# Altium PCB heron-payload-ssm.PcbDoc (part 1 of 3)
Units mm, origin at the board's own origin, x right, y up, seen from the top; angles counter-clockwise.
Board outline 128 x 54 mm, 4 copper layers (Top Layer, GND, VCC, Bottom Layer), stack 0.778 mm thick; 199 components, 184 nets, 851 pads, 416 vias.
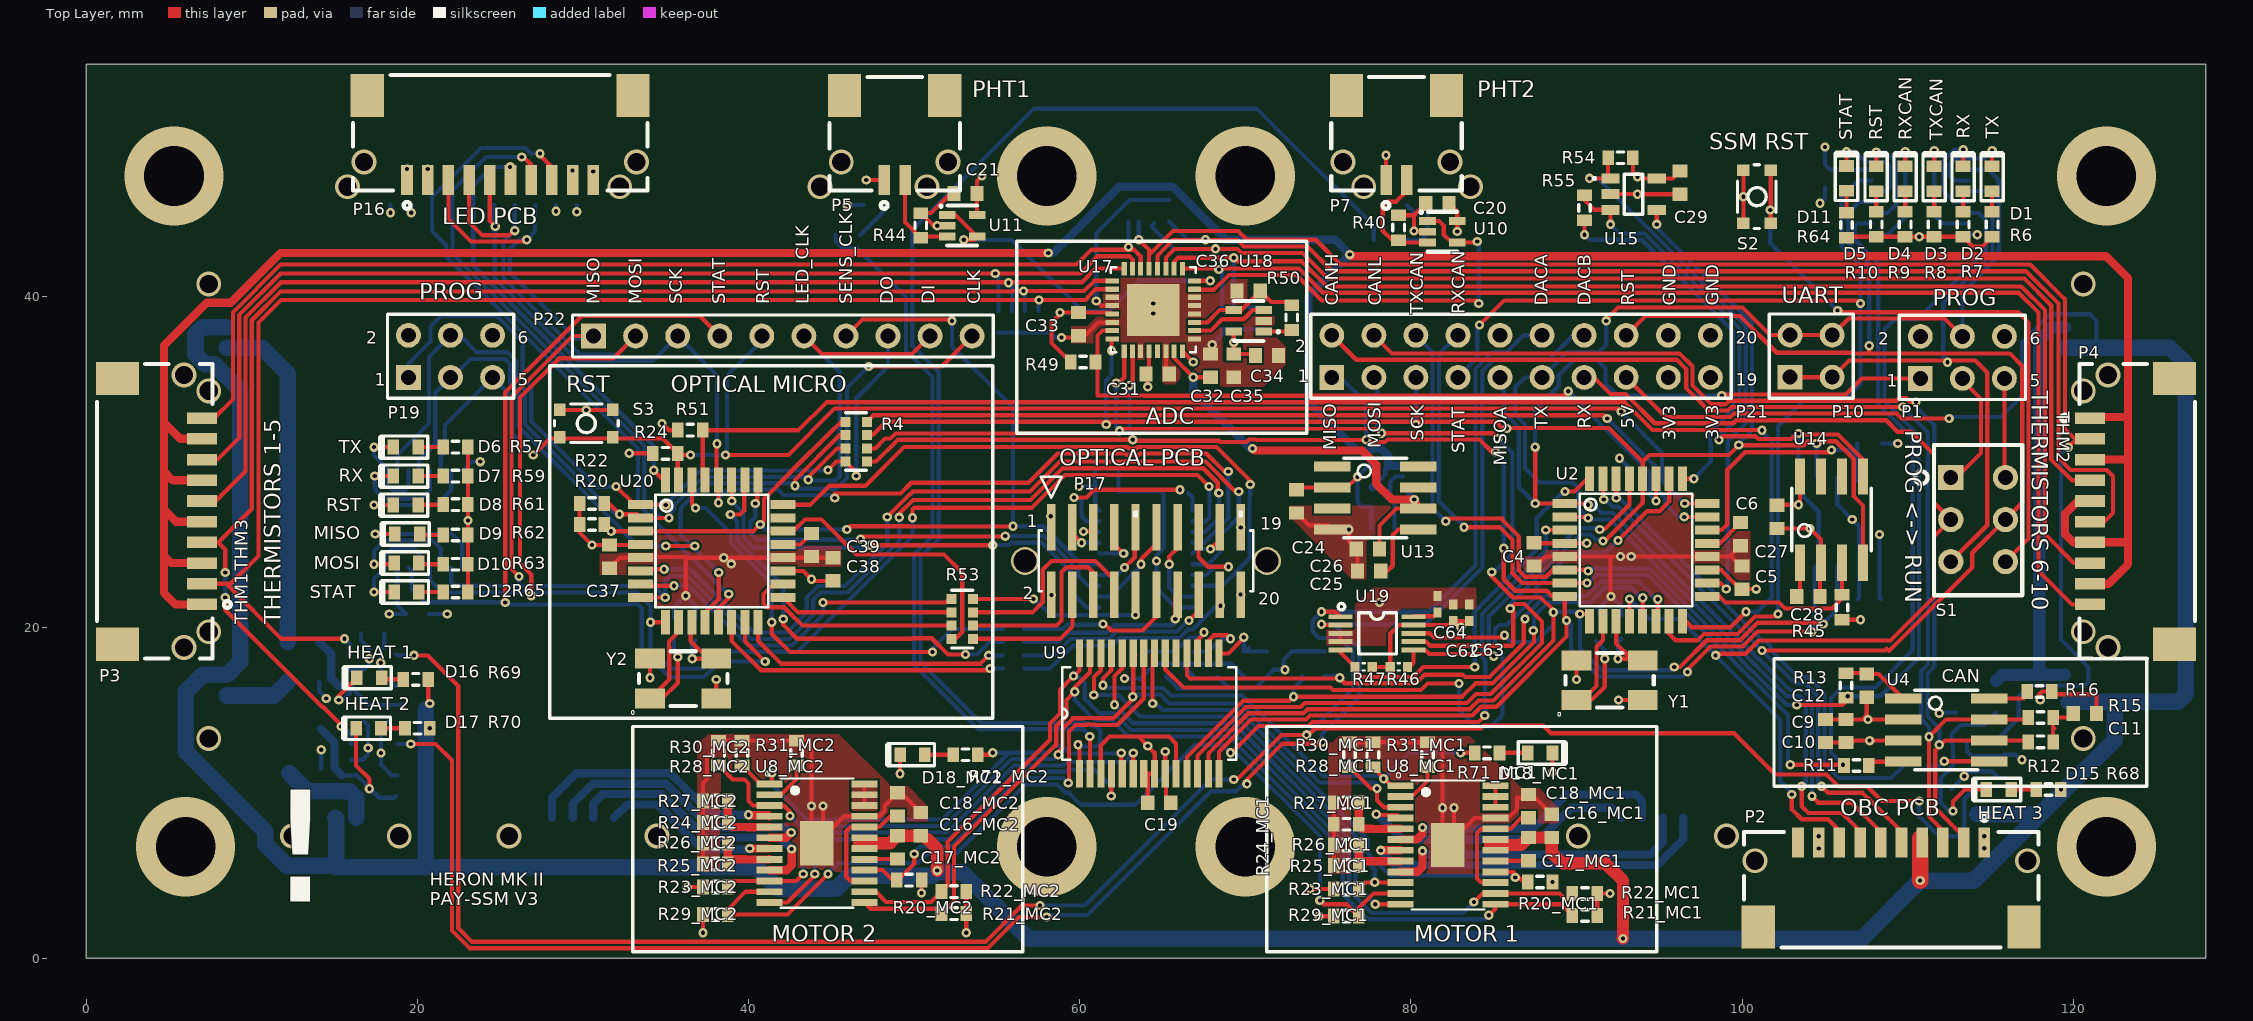
[diagram p0: Top Layer view]
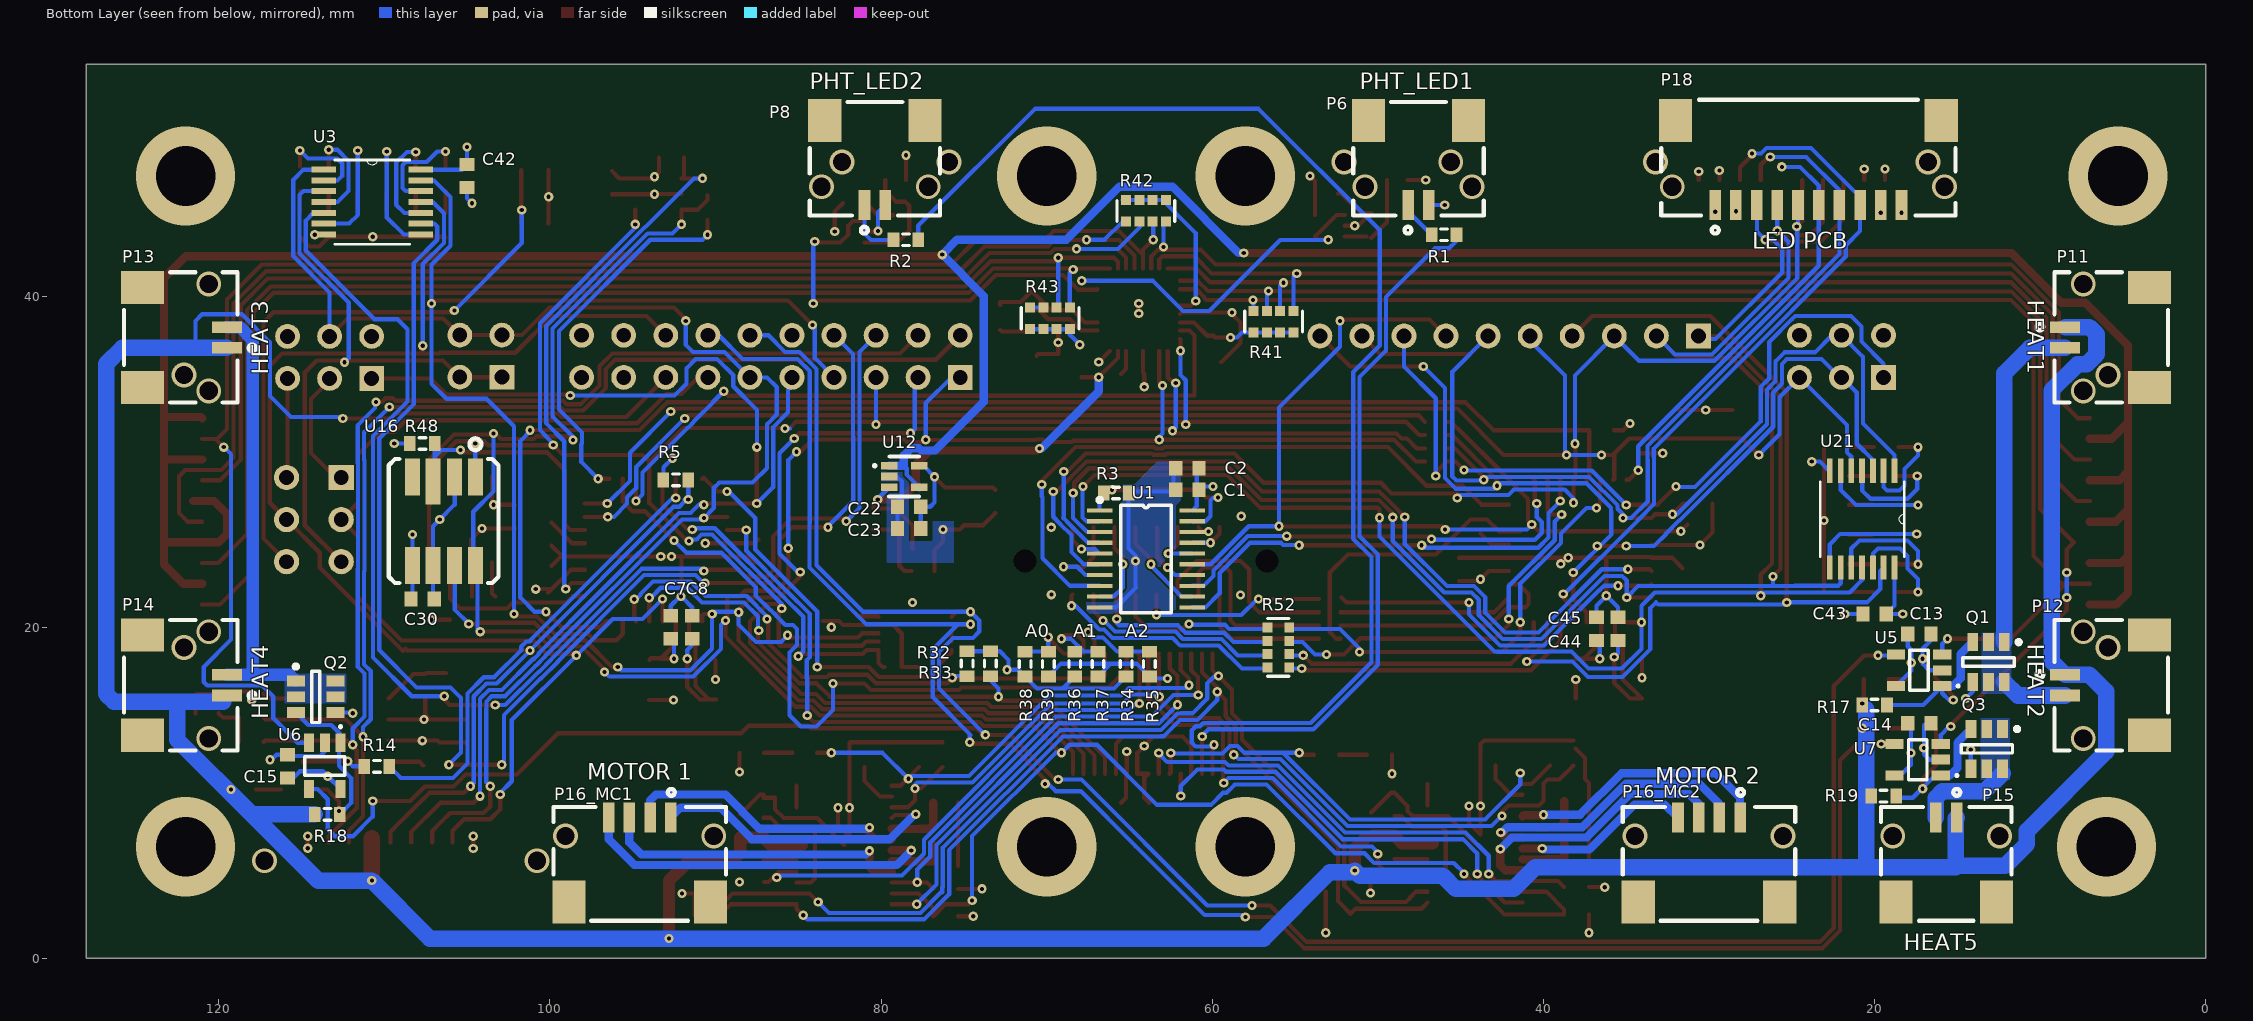
[diagram p1: Bottom Layer view, seen from below]
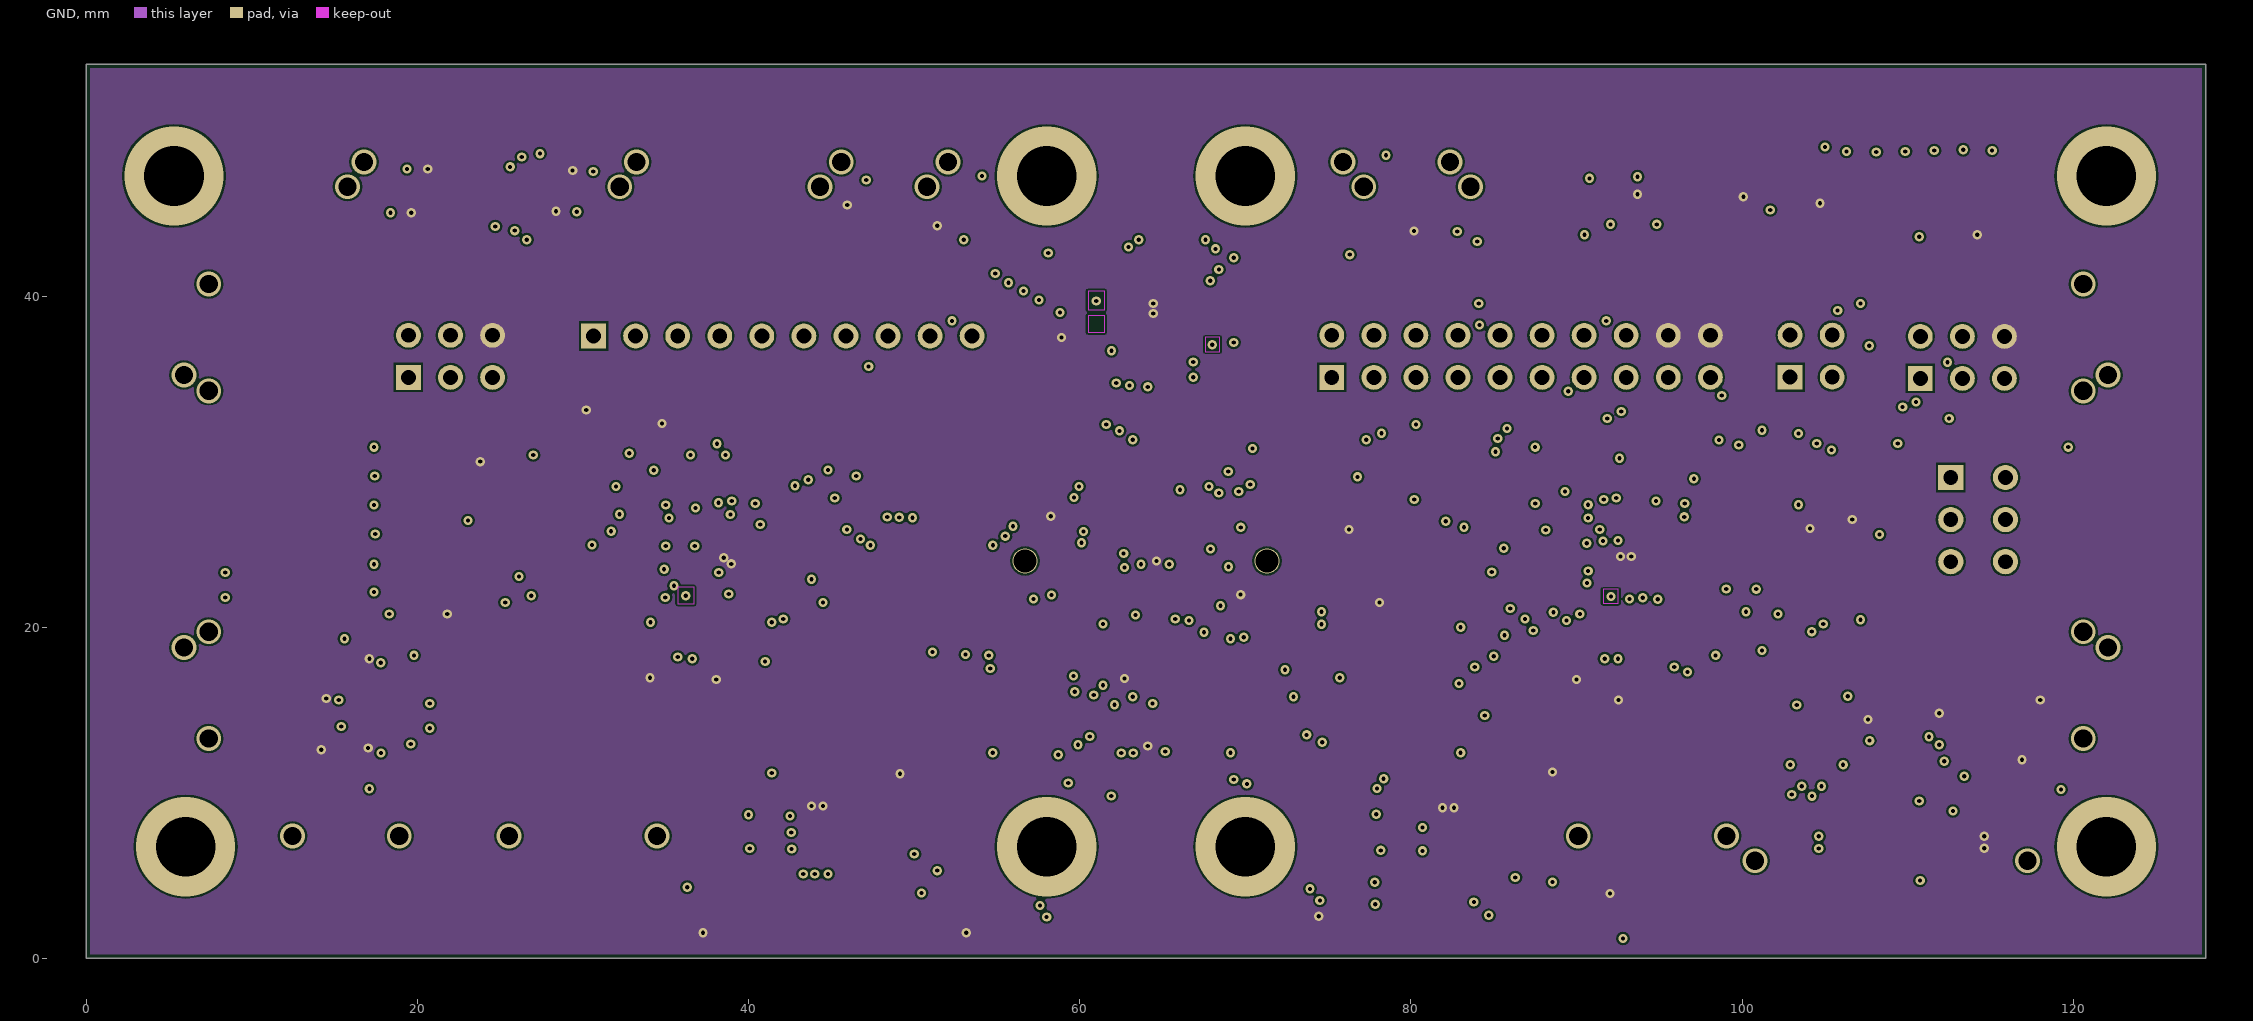
[diagram p2: GND]
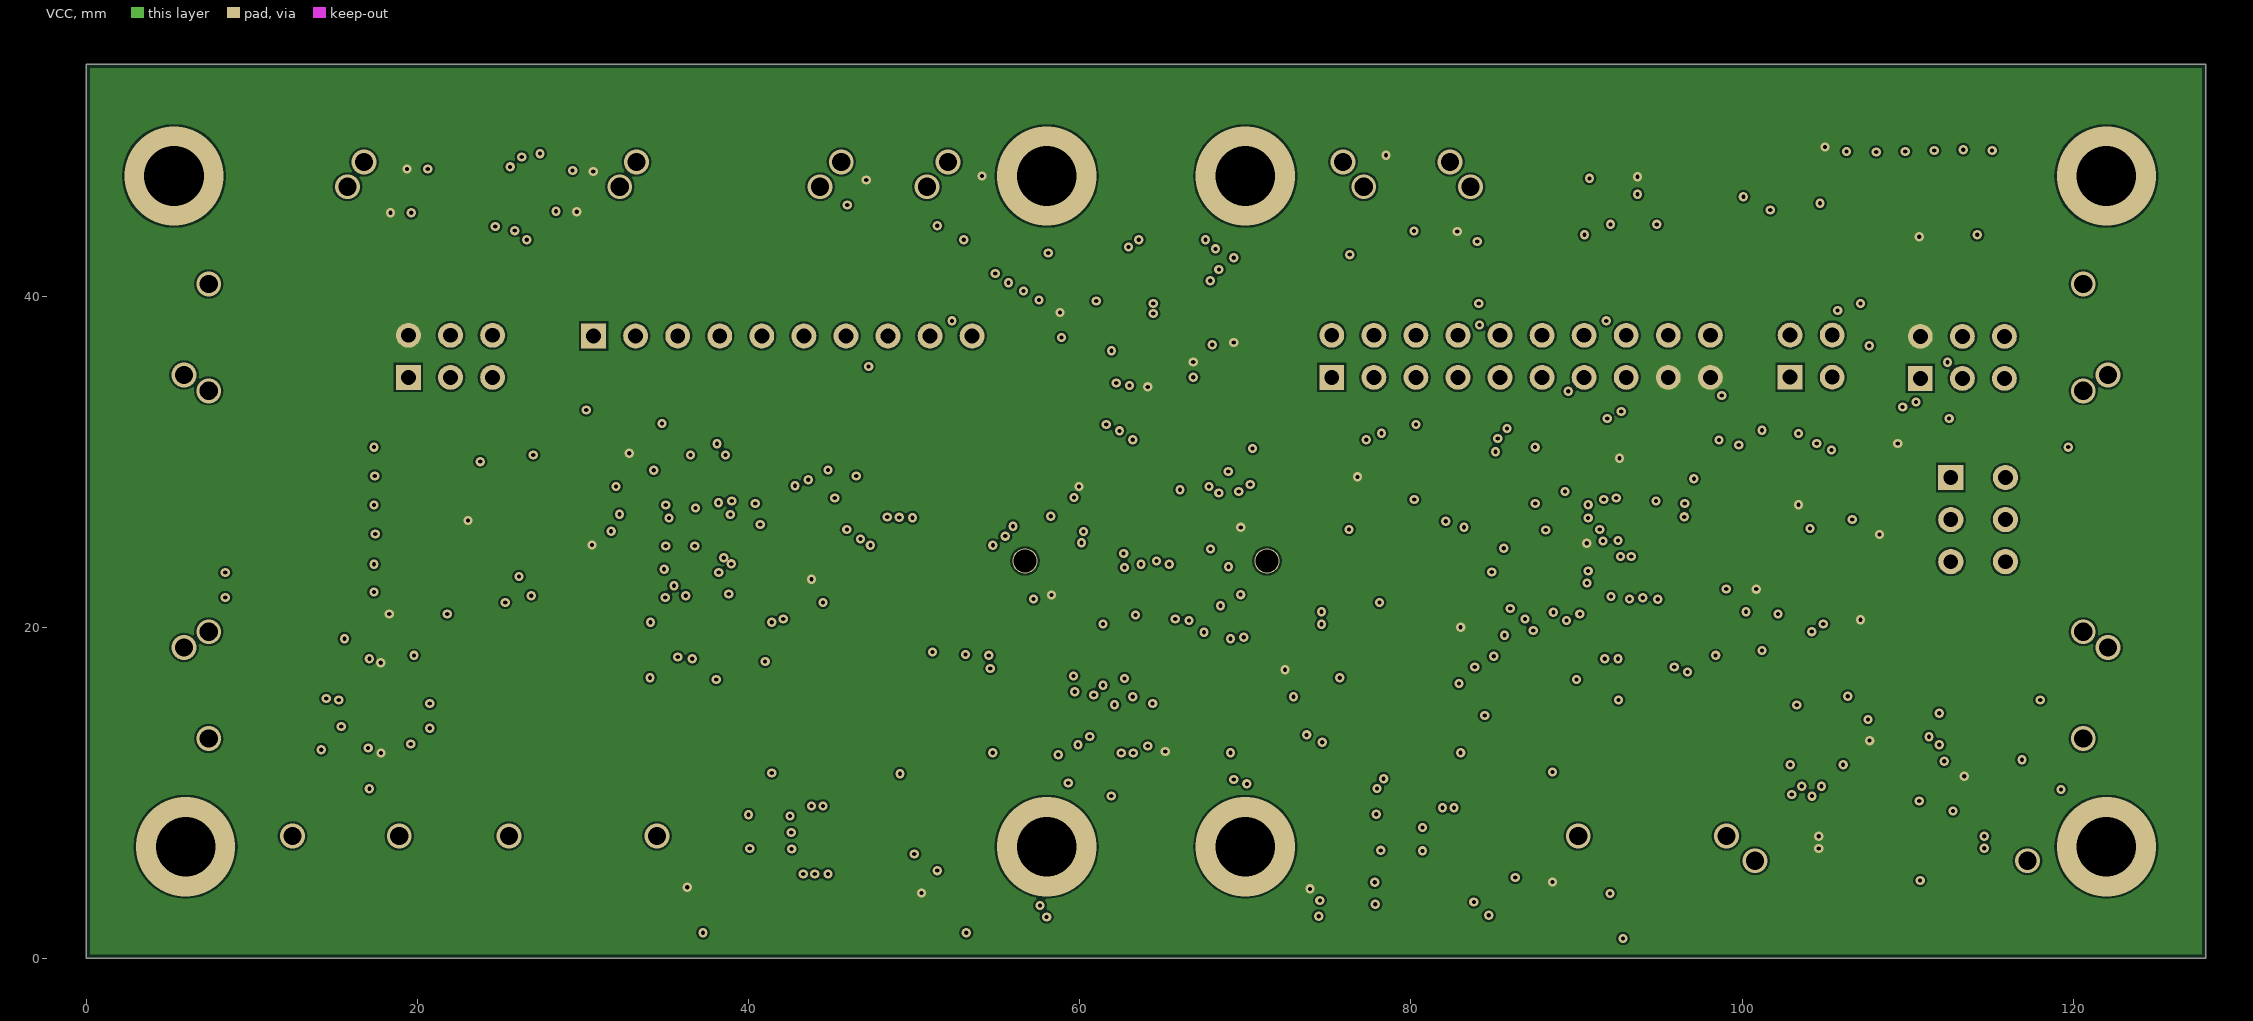
[diagram p3: VCC]

## Layer stack, top to bottom
Top Solder: solder mask 0.0102, Solder Resist, Dk 3.5
Top Layer: signal copper 0.0356
Dielectric 1: core 0.254, FR-4, Dk 4.2
GND: signal copper 0.036
Dielectric 5: prepreg 0.127, Dk 4.2
VCC: signal copper 0.036
Dielectric 4: core 0.254, Dk 4.2
Bottom Layer: signal copper 0.0356
Bottom Solder: solder mask 0.0102, Solder Resist, Dk 3.5

## Board outline
0,0 128,0 128,54 0,54

## Design rules (kind name [scope] priority, off if disabled: settings)
AssemblyTestPointUsage [All] p1 off:
AssemblyTestpoint [All] p1 off: testpointundercomponent=TRUE minsize=1.016 maxsize=2.54 preferedsize=1.524 minholesize=0 maxholesize=1.016 preferedholesize=0.813 testpointgrid=0.025 usegrid=TRUE gridtolerance=0 allowsidetop=TRUE allowsidebottom=TRUE
BoardOutlineClearance [OnLayer('VCC') or OnLayer('GND')] p1: gap=0.381 ignorepadtopadclearanceinfootprint=FALSE // Inner layer clearance
BoardOutlineClearance BoardOutlineClearance_1 [All] p2: gap=0.254 ignorepadtopadclearanceinfootprint=FALSE // top and bottom layers
Clearance [All] p1: gap=0.127 ignorepadtopadclearanceinfootprint=FALSE except(0: Arc-Hole Track-Hole SMDPad-Hole THPad-Hole Via-Hole Fill-Hole Poly-Hole Region-Hole Text-Hole)
FabricationTestPointUsage [All] p1 off: valid=0 allowmultiple=FALSE
FabricationTestpoint [All] p1 off: side=3 testpointundercomponent=FALSE minsize=1.016 maxsize=2.54 preferedsize=1.524 minholesize=0 maxholesize=1.016 preferedholesize=0.813 testpointgrid=0.025 allowsidetop=TRUE allowsidebottom=TRUE usegrid=TRUE gridtolerance=0
HoleSize [All] p1: absolutevalues=TRUE maxlimit=6.35 minlimit=0.203 maxpercent=80.000 minpercent=20.000
MinimumAnnularRing [All] p1: minimumring=0.127
MinimumSolderMaskSliver [All] p1: minsoldermaskwidth=0.102
PlaneConnect [All] p1: planeconnectstyle=Direct reliefexpansion=0.508 reliefentries=4 reliefconductorwidth=0.254 reliefairgap=0.254
PolygonConnect [All] p1: connectstyle=Direct reliefconductorwidth=0.254 reliefentries=4 polygonreliefangle="90 Angle" airgapwidth=0.254
RoomDefinition U_can_transciever [InComponentClass('U_can_transciever')] p1: confinementstyle=ConfineIn formatcopy=TRUE lockcomponents=FALSE outline 104.077,9.3 122.277,9.3 122.277,18 104.077,18
RoomDefinition U_dac-layout [InComponentClass('U_dac-layout')] p2: confinementstyle=ConfineIn formatcopy=TRUE lockcomponents=FALSE outline 74.65,16.882 84.4,16.882 84.4,22.632 74.65,22.632
RoomDefinition U_sensors-digital [InComponentClass('U_sensors-digital')] p3: confinementstyle=ConfineIn formatcopy=TRUE lockcomponents=FALSE outline 7.744,9.453 7.744,9.117 52.844,9.117 52.844,9.051 54.169,9.051 54.169,9.043 62.582,9.043 62.582,9 72.313,9 72.313,9.069 74.806,9.069 74.806,9.146 74.906,9.146 74.906,9.253 120.456,9.253 120.456,9.588 111.588,9.588 111.588,9.453
RoomDefinition U_thermistorADC [InComponentClass('U_thermistorADC')] p4: confinementstyle=ConfineIn formatcopy=TRUE lockcomponents=FALSE outline 69.914,34.327 68.206,34.327 68.206,34.376 66.752,34.376 66.752,37.13 63.909,37.13 63.909,37.673 61.155,37.673 61.155,39.381 62.455,39.381 62.455,42.135 63.909,42.135 63.909,43.632 70.411,43.632 70.411,42.841 74.664,42.841 74.664,40.885 74.787,40.885 74.787,37.877 73.568,37.877 73.568,34.627 69.914,34.627
RoomDefinition "ADC Ref Voltage" [InComponentClass('ADC Ref Voltage')] p5: confinementstyle=ConfineIn formatcopy=TRUE lockcomponents=FALSE outline 58.987,19.537 58.987,16.362 58.085,16.362 58.085,12.498 55.037,12.498 55.037,9.897 49.526,9.897 49.526,18.008 49.777,18.008 49.777,19.506 55.026,19.506 55.026,19.537
RoomDefinition MC1 [InComponentClass('MC1')] p6: confinementstyle=ConfineIn formatcopy=TRUE lockcomponents=FALSE outline 101.2,13.8 73.7,13.8 73.7,1.2 101.2,1.2
RoutingVias [All] p1: holewidth=0.254 width=0.559 viastyle="Through Hole" minholewidth=0.254 minwidth=0.559 maxholewidth=12.7 maxwidth=12.7
SilkToSilkClearance [All] p1: silktosilkclearance=0
SilkToSolderMaskClearance [IsPad] p1: minsilkscreentomaskgap=0.076 clearancetoexposedcopper=TRUE
SolderMaskExpansion [All] p1: expansion=0.102
Width [All] p1: maxlimit=254 minlimit=0.152 preferedwidth=0.254
21 further rules are at their usual default settings.

## Classes and differential pairs
component class U_sensors-digital: C1 C2 C? P16 P17 P18 P22 P? R3 R4 R51 R52 R53 R? U1
component class optical_micro: C37 C38 C39 C43 C44 C45 D6 D7 D8 D9 D10 D12 P19 R20 R22 R24 R57 R59 R61 R62 R63 R65 S3 U20 U21 Y2
component class MC2: C16_MC2 C17_MC2 C18_MC2 D18_MC2 P16_MC2 R20_MC2 R21_MC2 R22_MC2 R23_MC2 R24_MC2 R25_MC2 R26_MC2 R27_MC2 R28_MC2 R29_MC2 R30_MC2 R31_MC2 R71_MC2 U8_MC2
component class MC1: C16_MC1 C17_MC1 C18_MC1 D18_MC1 P16_MC1 R20_MC1 R21_MC1 R22_MC1 R23_MC1 R24_MC1 R25_MC1 R26_MC1 R27_MC1 R28_MC1 R29_MC1 R30_MC1 R31_MC1 R71_MC1 U8_MC1
channel class motor_control: U_motor_control_1 U_motor_control_2
component class U_thermistorADC: C31 C32 C33 C34 C35 C36 R49 R50 U17 U18
component class U_sensors: C27 C28 C29 C30 R45 R48 R54 R55 U14 U15 U16
component class "ADC Ref Voltage": C22 C23 C24 C25 C26 U12 U13
component class U_positioningAndThermistor: C20 C21 R40 R41 R42 R43 R44 U10 U11
component class U_portExpander: C19 R32 R33 R34 R35 R36 R37 R38 R39 U9
component class U_heater_control: C13 C14 C15 D15 D16 D17 P11 P12 P13 P14 P15 Q1 Q2 Q3 R17 R18 R19 R68 R69 R70 U5 U6 U7
component class U_dac-layout: C62 C63 C64 R46 R47 U19
component class U_can_transciever: C9 C10 C11 C12 R11 R12 R13 R14 R15 R16 U4
component class U_ATmega32M1: C4 C5 C6 C7 C8 C42 D1 D2 D3 D4 D5 D11 P1 P10 R5 R6 R7 R8 R9 R10 R64 S1 S2 U2 U3 Y1
component class pay-ssm: P2 P3 P4 P5 P6 P7 P8 P21 R1 R2

## Components (designator, comment, footprint, x,y, rotation, side; value= is the part's Value field where it differs from the comment)
C1 "0.1uF" 1608[0603] 61.5,28.3 r180 bottom (schematic designator C37)
C2 "10uF" 1608[0603] 61.5,29.6 r180 bottom (schematic designator C38)
C4 "0.1uF" 1608[0603] 87.434,24.4 r90 top
C5 "0.1uF" 1608[0603] 100,23 r270 top
C6 "0.1uF" 1608[0603] 99.9,25.619 r270 top
C7 "15pF 1%" 1608[0603] 92.7,20 r270 bottom value="14pF 1%"
C8 "15pF 1%" 1608[0603] 91.4,20 r270 bottom value="14pF 1%"
C9 "10uF" 1608[0603] 105.027,13.731 r270 top
C10 "0.1uF" 1608[0603] 106.277,13.731 r270 top
C11 "47pF" 1608[0603] 120.7,14.8 r180 top
C12 "0.1uF" 1608[0603] 107.527,16.474 r90 top
C13 "0.1uF" 1608[0603] 17.3,19.6 r180 bottom
C14 "0.1uF" 1608[0603] 17.3,14.2 r180 bottom
C15 "100pF" 1608[0603] 115.848,11.6 r90 bottom value=0.1uF
C16_MC1 "10uF" 1608[0603] 88.5,8 r270 top (schematic designator C16)
C16_MC2 "10uF" 1608[0603] 50.4,8.106 r270 top (schematic designator C16)
C17_MC1 "10nF 16V X7R" 1608[0603] 87.097,6.6 r90 top (schematic designator C17)
C17_MC2 "10nF 16V X7R" 1608[0603] 48.997,6.706 r90 top (schematic designator C17)
C18_MC1 "2.2uF" 1608[0603] 87.1,9.2 r270 top (schematic designator C18)
C18_MC2 "2.2uF" 1608[0603] 49,9.306 r270 top (schematic designator C18)
C19 "0.1uF" 1608[0603] 64.8,9.4 r0 top
C20 "0.1uF" 1608[0603] 81.6,45.6 r0 top
C21 "0.1uF" 1608[0603] 53.1,46.2 r0 top
C22 "10uF" 1608[0603] 78.3,27.274 r180 bottom
C23 "0.1uF" 1608[0603] 78.3,25.965 r180 bottom
C24 "10uF" 1608[0603] 73.1,27.6 r90 top
C25 "1uF" 1608[0603] 77.469,23.4 r0 top
C26 "10uF" 1608[0603] 77.4,24.721 r0 top
C27 "0.22uF" 1608[0603] 102.1,26.665 r90 top
C28 "0.1uF" 1608[0603] 104,21.85 r180 top
C29 "0.1uF" 1608[0603] 96.256,46.849 r90 top
C30 "0.1uF" 1608[0603] 107.681,21.7 r0 bottom
C31 "1uF" 1608[0603] 64.7,35.3 r180 top
C32 "10uF" 1608[0603] 67.9,35.8 r270 top
C33 "1uF" 1608[0603] 59.925,38.3 r90 top
C34 "10uF" 1608[0603] 71.305,36.4 r180 top
C35 "0.1uF" 1608[0603] 69.3,35.8 r90 top
C36 "1uF" 1608[0603] 70.2,40.3 r0 top
C37 "0.1uF" 1608[0603] 31.6,24.265 r90 top (schematic designator C39)
C38 "0.1uF" 1608[0603] 45.1,23.5 r270 top (schematic designator C40)
C39 "0.1uF" 1608[0603] 43.8,24.965 r270 top (schematic designator C41)
C42 "Cap Semi" 1608[0603] 105,47.25 r90 bottom value=0.1uF
C43 "Cap Semi" 1608[0603] 20,20.8 r180 bottom value=0.1uF
C44 "15pF 1%" 1608[0603] 35.503,19.9 r270 bottom value="14pF 1%"
C45 "15pF 1%" 1608[0603] 36.803,19.9 r270 bottom value="14pF 1%"
C62 "0.1uF" 0402#1 82.55,20.882 r270 top (schematic designator C1)
C63 "100pF" 0402#1 83.525,20.882 r270 top (schematic designator C2)
C64 "150nF" 0402#1 81.6,21.382 r90 top (schematic designator C3)
D1 "LED2" 0603-LED 115.097,47.08 r90 top
D2 "LED2" 0603-LED 113.347,47.08 r90 top
D3 "LED2" 0603-LED 111.597,47.08 r90 top
D4 "LED2" 0603-LED 109.847,47.08 r90 top
D5 "LED2" 0603-LED 108.097,47.08 r90 top
D6 "LED2" 0603-LED 19.304,30.875 r180 top
D7 "LED2" 0603-LED 19.304,29.125 r180 top
D8 "LED2" 0603-LED 19.304,27.375 r180 top
D9 "LED2" 0603-LED 19.394,25.625 r180 top
D10 "LED2" 0603-LED 19.344,23.875 r180 top
D11 "LED2" 0603-LED 106.3,47.1 r90 top
D12 "LED2" 0603-LED 19.344,22.125 r180 top
D15 "LED2" 0603-LED 115.5,10.2 r180 top
D16 "LED2" 0603-LED 17.1,16.95 r180 top
D17 "LED2" 0603-LED 17.05,13.9 r180 top
D18_MC1 "LED2" 0603-LED 87.8,12.4 r0 top (schematic designator D18)
D18_MC2 "LED2" 0603-LED 49.9,12.3 r180 top (schematic designator D18)
P1 "PROG" HDR2X3 110.76,35.025 r0 top
P2 "INCOMING FROM OBC" DF14-10P-1.25H(55) 109,7 r180 top
P3 "THERMISTORS 1-5" DF14-10P-1.25H(55) 7,27 r90 top locked
P4 "THERMISTORS 6-10" DF14-10P-1.25H(55) 121,27 r270 top
P5 "PHT_TRANS_1" DF14-2P-1.25H(55) 48.825,47 r0 top
P6 "IR_LED_1" DF14-2P-1.25H(55) 47.545,45.5 r180 bottom
P7 "PHT_TRANS_2" DF14-2P-1.25H(55) 79.125,47 r0 top
P8 "IR_LED_2" DF14-2P-1.25H(55) 80.375,45.5 r180 bottom
P10 "UART" HDR2X2 102.9,35.1 r0 top (schematic designator P9)
P11 "HEAT1" DF14-2P-1.25H(55) 8.5,37.5 r270 bottom locked (schematic designator P10)
P12 "HEAT2" DF14-2P-1.25H(55) 8.5,16.5 r270 bottom (schematic designator P11)
P13 "HEAT3" DF14-2P-1.25H(55) 119.5,37.5 r90 bottom (schematic designator P12)
P14 "HEAT4" DF14-2P-1.25H(55) 119.5,16.5 r90 bottom (schematic designator P13)
P15 "HEAT5" DF14-2P-1.25H(55) 15.675,8.5 r0 bottom (schematic designator P14)
P16 "OUTGOING" DF14-10P-1.25H(55) 25,47 r0 top locked
P16_MC1 "MOTOR" DF14-4P-1.25H(55) 94.575,8.5 r0 bottom (schematic designator P15)
P16_MC2 "MOTOR" DF14-4P-1.25H(55) 30,8.5 r0 bottom (schematic designator P15)
P17 "Header 10X2" CON20_2X10_Female 64,24 r180 top locked
P18 "OUTGOING" DF14-10P-1.25H(55) 24,45.5 r180 bottom locked
P19 "Header 3X2" HDR2X3 19.46,35.089 r0 top
P21 "Header 10X2H" HDR2X10 75.22,35.089 r0 top
P22 "Header 10" HDR1X10 30.64,37.588 r0 top
Q1 "N-MOS" SOT23-6_N 13.125,17.9 r270 bottom
Q2 "N-MOS" SOT23-6_N 114.138,15.8 r180 bottom
Q3 "N-MOS" SOT23-6_N 13.225,12.65 r270 bottom
R1 "330" J1-0603 46,43.7 r0 bottom
R2 "330" J1-0603 78.5,43.4 r0 bottom
R3 "10K" J1-0603 65.8,28.1 r0 bottom (schematic designator R51)
R4 "100 Quad" ResQuad-320X150 46.5,31.2 r90 top (schematic designator R52)
R5 "30K" J1-0603 92.393,28.9 r0 bottom
R6 "330" J1-0603 115.097,44.33 r90 top
R7 "330" J1-0603 113.347,44.33 r90 top
R8 "330" J1-0603 111.597,44.33 r90 top
R9 "330" J1-0603 109.847,44.33 r90 top
R10 "330" J1-0603 108.097,44.33 r90 top
R11 "100" J1-0603 106.9,11.656 r180 top
R12 "60" J1-0603 118.027,13.077 r0 top
R13 "100" J1-0603 106.277,16.481 r270 top
R14 "100" J1-0603 110.45,11.6 r180 bottom
R15 "60" J1-0603 118.027,14.544 r0 top
R16 "0 Ohm" J1-0603 117.958,16.119 r180 top
R17 "1K" J1-0603 20,15.3 r0 bottom
R18 "1K" J1-0603 113.438,8.7 r0 bottom
R19 "1K" J1-0603 19.45,9.8 r0 bottom
R20 "20K" J1-0603 30.546,26.2 r180 top (schematic designator R56)
R20_MC1 "10K" J1-0603 87.8,4.619 r0 top (schematic designator R20)
R20_MC2 "10K" J1-0603 49.7,4.725 r0 top (schematic designator R20)
R21_MC1 "10K" J1-0603 90.5,2.594 r180 top (schematic designator R21)
R21_MC2 "10K" J1-0603 52.4,2.7 r180 top (schematic designator R21)
R22 "20K" J1-0603 30.546,27.465 r180 top (schematic designator R58)
R22_MC1 "10K" J1-0603 90.5,3.925 r180 top (schematic designator R22)
R22_MC2 "10K" J1-0603 52.4,4.031 r180 top (schematic designator R22)
R23_MC1 "10K" J1-0603 76.1,4.2 r180 top (schematic designator R23)
R23_MC2 "10K" J1-0603 38,4.306 r180 top (schematic designator R23)
R24 "30K" J1-0603 34.97,30.5 r180 top (schematic designator R60)
R24_MC1 "0" J1-0603 76.1,8.1 r0 top (schematic designator R24)
R24_MC2 "0" J1-0603 38,8.206 r0 top (schematic designator R24)
R25_MC1 "0" J1-0603 76.1,5.6 r0 top (schematic designator R25)
R25_MC2 "0" J1-0603 38,5.706 r0 top (schematic designator R25)
R26_MC1 "0" J1-0603 76.1,6.85 r0 top (schematic designator R26)
R26_MC2 "0" J1-0603 38,6.956 r0 top (schematic designator R26)
R27_MC1 "0" J1-0603 76.1,9.4 r0 top (schematic designator R27)
R27_MC2 "0" J1-0603 38,9.506 r0 top (schematic designator R27)
R28_MC1 "10K" J1-0603 77.7,12.3 r270 top (schematic designator R28)
R28_MC2 "10K" J1-0603 39.6,12.406 r270 top (schematic designator R28)
R29_MC1 "10K" J1-0603 76.1,2.551 r0 top (schematic designator R29)
R29_MC2 "10K" J1-0603 38,2.657 r0 top (schematic designator R29)
R30_MC1 "51K" J1-0603 76.294,12.3 r270 top (schematic designator R30)
R30_MC2 "51K" J1-0603 38.194,12.406 r270 top (schematic designator R30)
R31_MC1 "51K" J1-0603 81,12.3 r270 top (schematic designator R31)
R31_MC2 "51K" J1-0603 42.9,12.406 r270 top (schematic designator R31)
R32 "10K" J1-0603 74.8,17.8 r90 bottom
R33 "10k" J1-0603 73.4,17.8 r90 bottom
R34 "0 Ohm" J1-0603 65.2,17.775 r90 bottom
R35 "0 Ohm" J1-0603 63.8,17.775 r90 bottom
R36 "0 Ohm" J1-0603 68.3,17.775 r90 bottom
R37 "0 Ohm" J1-0603 66.9,17.775 r90 bottom
R38 "0 Ohm" J1-0603 71.3,17.775 r90 bottom
R39 "0 Ohm" J1-0603 69.9,17.775 r90 bottom
R40 "1K" J1-0603 79.256,44.128 r270 top
R41 "10K 1% Quad" ResQuad-320X150 56.3,38.45 r180 bottom
R42 "10K 1% Quad" ResQuad-320X150 64,45.15 r0 bottom
R43 "10K 1% Quad" ResQuad-320X150 69.8,38.65 r180 bottom
R44 "1K" J1-0603 50.4,44.261 r90 top
R45 "10K" J1-0603 106.029,21.2 r270 top
R46 "10K" 0402#2 79.275,17.6 r180 top (schematic designator R3)
R47 "10K" 0402#2 77.138,17.6 r0 top (schematic designator R4)
R48 "10K" J1-0603 107.7,31.1 r180 bottom
R49 "10K" J1-0603 60.2,36.019 r180 top
R50 "100" J1-0603 72.8,38.7 r90 top
R51 "10k" J1-0603 36.478,31.9 r0 top (schematic designator R53)
R52 "100 Quad" ResQuad-320X150 56,18.775 r90 bottom (schematic designator R54)
R53 "100 Quad" ResQuad-320X150 52.9,20.5 r270 top (schematic designator R55)
R54 "10K" J1-0603 92.656,48.349 r0 top (schematic designator R46)
R55 "10K" J1-0603 90.481,45.324 r90 top (schematic designator R47)
R57 "330" J1-0603 22.3,30.875 r180 top
R59 "330" J1-0603 22.3,29.125 r180 top
R61 "330" J1-0603 22.3,27.4 r180 top
R62 "330" J1-0603 22.3,25.575 r180 top
R63 "330" J1-0603 22.3,23.8 r180 top
R64 "330" J1-0603 106.3,44.279 r90 top
R65 "330" J1-0603 22.3,22.125 r180 top
R68 "Res3" J1-0603 118.5,10.2 r0 top value=500
R69 "Res3" J1-0603 19.9,16.854 r0 top value=500
R70 "Res3" J1-0603 20,13.9 r0 top value=500
R71_MC1 "Res3" J1-0603 84.6,12.415 r180 top value=330 (schematic designator R71)
R71_MC2 "Res3" J1-0603 53.1,12.3 r0 top value=330 (schematic designator R71)
S1 "MODE SELECT" DPST_32M1_SWITCH 114.25,26.5 r0 top
S2 "RST PUSH" PUSHBUTTON 100.9,46 r270 top
S3 "SW-PB" PUSHBUTTON 30.2,32.3 r180 top
U1 "SN74LVC244A" SOP65P650X440-20N 66.8,27.05 r180 bottom (schematic designator U19)
U2 "ATMega32M1" QFP80P900X900X120-32N 93.593,24.665 r0 top
U3 "SN74LV07A" SOP65P640X120-14N 110.729,45.675 r180 bottom
U4 "SN65HVD233D" SOIC127P500X600-8N 112.327,13.786 r270 top
U5 "MCP6546" SOT-23-5_95P290X160-5N 15.916,16.448 r0 bottom
U6 "MCP6546" SOT-23-5_95P290X160-5N 112.638,13.025 r270 bottom
U7 "MCP6546" SOT-23-5_95P290X160-5N 16,11.05 r0 bottom
U8_MC1 "DRV8834" SOP65P640X120-25N 82.227,6.85 r0 top (schematic designator U8)
U8_MC2 "DRV8834" SOP65P640X120-25N 44.127,6.956 r0 top (schematic designator U8)
U9 "MCP23S17" SOP65P780X200-28N 64.193,14.786 r90 top
U10 "AD8613" SOP-65P200X125-5N 81,44.528 r0 top
U11 "AD8613" SOP-65P200X125-5N 52,44.9 r0 top
U12 "AD8613" SOP-65P200X125-5N 79.5,29.756 r180 bottom
U13 "REF5025" SOIC127P500X600-8N 77.841,27.807 r270 top
U14 "HIH7131" SOIC127P500X600-8N 105.394,26.5 r0 top
U15 "LM95071" SOT-23-5_95P290X160-5N 92.048,47.106 r0 top
U16 "MS5803-05BA" MS5803-05BA_125P640x620-8N 106.4,26.4 r270 bottom
U17 "ADS7952" QFN50P500X500X100-32N 64.439,39.165 r180 top
U18 "AD8613" SOP-65P200X125-5N 71.1,37.85 r180 top
U19 "DAC7562" SOP10-50P300X300-10N 75.75,20.632 r0 top (schematic designator U1)
U20 "ATMega32M1" QFP80P900X900X120-32N 37.779,24.6 r0 top
U21 "SN74LV07A" SOP65P640X120-14N 20.75,26.525 r270 bottom
Y1 "8MHz Crystal" OSCSC500X320X110-4N 92,16.8 r90 top
Y2 "8MHz Crystal" OSCSC500X320X110-4N 36.053,16.9 r90 top

## Footprints (in the part's own frame and the unit in brackets; to place one, negate y for a bottom-side part, rotate by r counter-clockwise, add the part's x,y. Pads: shape width x height; smd on the part's side, far side on the other; paste and mask are expansions set on the pad)
0402#1 [mm] "Chip Capacitor, Body 1.0x0.5mm, IPC High Density"
  rect 0.6x0.5 smd: 1(-0.5,0) 2(0.5,0)
  body extent -0.55,-0.3 0.55,0.3, height 1.3
0402#2 [mm] "0402 Resistor"
  rect 0.55x0.6 smd: 1(-0.525,0) 2(0.525,0)
  silkscreen extent -0.08,-0.23 0.08,0.22
0603-LED [mm]
  rect 0.7x0.9 smd: 1(-0.75,0) 2(0.75,0)
  silkscreen extent -1.32,-0.68 1.5,0.67, body extent -0.85,-0.48 0.85,0.48, height 0.9
1608[0603] [mm] "Chip Capacitor, Body 1.6x0.8mm, IPC High Density"
  rect 0.8x0.9 smd: 1(-0.7,0) 2(0.7,0)
  body extent -0.87,-0.48 0.87,0.48, height 1.3
CON20_2X10_Female [mil] "1.27mm pitch, 20 position female header"
  rect 20x110 smd: 1(225,-80) 2(225,80) 3(175,-80) 4(175,80) 5(125,-80) 6(125,80) 7(75,-80) 8(75,80) 9(25,-80) 10(25,80) 11(-25,-80) 12(-25,80) 13(-75,-80) 14(-75,80) 15(-125,-80) 16(-125,80) 17(-175,-80) 18(-175,80) 19(-225,-80) 20(-225,80)
  round 66.93 / inner round 60 / far side round 38 hole 55.12: 21(-287.6,0) 22(287.6,0)
  silkscreen extent -255,-200 255,72, body extent 0,0 10,10, height 10
DF14-2P-1.25H(55) [mm]
  rect 0.7x1.8 smd: 1(-0.625,0) 2(0.625,0)
  rect 2x2.6 smd: ""(-3.025,5.1) ""(3.025,5.1)
  silkscreen extent -3.94,-1.73 3.94,6.22, body extent -3.72,-0.48 3.73,6.22, height 2.5
DF14-4P-1.25H(55) [mm]
  rect 0.7x1.8 smd: 1(-1.875,0) 2(-0.625,0) 3(0.625,0) 4(1.875,0)
  rect 2x2.6 smd: ""(-4.275,5.1) ""(4.275,5.1)
  silkscreen extent -5.21,-1.73 5.21,6.22, body extent -4.95,-0.47 5,6.23, height 2.5
DF14-10P-1.25H(55) [mm]
  rect 0.7x1.8 smd: 1(-5.625,0) 2(-4.375,0) 3(-3.125,0) 4(-1.875,0) 5(-0.625,0) 6(0.625,0) 7(1.875,0) 8(3.125,0) 9(4.375,0) 10(5.625,0)
  rect 2x2.6 smd: ""(-8.025,5.1) ""(8.025,5.1)
  silkscreen extent -8.89,-1.73 8.89,6.35, body extent -8.73,-0.5 8.72,6.2, height 2.49
DPST_32M1_SWITCH [mil]
  rect 60x60 hole 35: 1(-65,100)
  round 60 hole 35: 2(-65,0) 3(-65,-100) 4(65,100) 5(65,0) 6(65,-100)
  silkscreen extent -150,-180 105,177
HDR1X10 [mm] "Connector; Header; 10 Position"
  rect 1.5x1.5 hole 0.9: 1(0,0)
  round 1.5 hole 0.9: 2(2.54,0) 3(5.08,0) 4(7.62,0) 5(10.16,0) 6(12.7,0) 7(15.24,0) 8(17.78,0) 9(20.32,0) 10(22.86,0)
  silkscreen extent -1.27,-1.27 24.13,1.27
HDR2X2 [mm] "Connector; Header; 2x2 Position"
  rect 1.5x1.5 hole 0.9: 1(0,0)
  round 1.5 hole 0.9: 2(0,2.54) 3(2.54,0) 4(2.54,2.54)
  silkscreen extent -1.27,-1.27 3.81,3.81
HDR2X3 [mm] "Connector; Header; 3x2 Position"
  rect 1.5x1.5 hole 0.9: 1(0,0)
  round 1.5 hole 0.9: 2(0,2.54) 3(2.54,0) 4(2.54,2.54) 5(5.08,0) 6(5.08,2.54)
  silkscreen extent -1.27,-1.27 6.35,3.81
HDR2X10 [mm] "Connector; Header; 10x2 Position"
  rect 1.5x1.5 hole 0.9: 1(0,0)
  round 1.5 hole 0.9: 2(0,2.54) 3(2.54,0) 4(2.54,2.54) 5(5.08,0) 6(5.08,2.54) 7(7.62,0) 8(7.62,2.54) 9(10.16,0) 10(10.16,2.54) 11(12.7,0) 12(12.7,2.54) 13(15.24,0) 14(15.24,2.54) 15(17.78,0) 16(17.78,2.54) 17(20.32,0) 18(20.32,2.54) 19(22.86,0) 20(22.86,2.54)
  silkscreen extent -1.27,-1.27 24.13,3.81
J1-0603 [mm] "Chip Resistor, Body 1.6x0.8mm, IPC High Density"
  rect 0.7x0.9 smd: 1(-0.75,0) 2(0.75,0)
  silkscreen extent -0.2,-0.35 0.2,0.35, body extent -0.85,-0.48 0.85,0.48, height 0.9
MS5803-05BA_125P640x620-8N [mm] "Footprint for the MS5803-05BA pressure sensor"
  rect 2.25x0.9 smd: 1(-2.675,1.9) 2(-2.675,0.65) 4(-2.675,-1.9) 5(2.675,-1.9) 6(2.675,-0.65) 7(2.675,0.65) 8(2.675,1.9)
  rect 2.8x0.9 smd: 3(-2.4,-0.65)
  silkscreen extent -5.01,-3.33 3.73,3.3
OSCSC500X320X110-4N [mm] "ABM3B-8.000MHZ-10-D-1-G-T Abracon 8MHz crystal"
  rect 1.2x1.8 smd: 1(-1.2,2) 2(-1.2,-2) 3(1.2,-2) 4(1.2,2)
  silkscreen extent -2.15,-2.67 1.65,3.15, body extent -1.6,-2.5 1.58,2.5, height 1.1
PUSHBUTTON [mm] "PTS830GM140 SMTR LFS"
  rect 0.7x0.75 smd: 1(-1.6,0.825) 1(1.6,0.825) 2(-1.6,-0.825) 2(1.6,-0.825)
  silkscreen extent -1.92,-1.17 1.92,1.15
QFN50P500X500X100-32N [mil]
  rect 32x12 smd: 1(-98,69) 2(-98,49) 3(-98,30) 4(-98,10) 5(-98,-10) 6(-98,-30) 7(-98,-49) 8(-98,-69) 17(98,-69) 18(98,-49) 19(98,-30) 20(98,-10) 21(98,10) 22(98,30) 23(98,49) 24(98,69)
  rect 12x32 smd: 9(-69,-98) 10(-49,-98) 11(-30,-98) 12(-10,-98) 13(10,-98) 14(30,-98) 15(49,-98) 16(69,-98) 25(69,98) 26(49,98) 27(30,98) 28(10,98) 29(-10,98) 30(-30,98) 31(-49,98) 32(-69,98)
  rect 124x124 smd: 33(0,0)
  silkscreen extent -101,-101 101,101
QFP80P900X900X120-32N [mm]
  rect 1.5x0.55 smd: 1(-4.3,2.8) 2(-4.3,2) 3(-4.3,1.2) 4(-4.3,0.4) 5(-4.3,-0.4) 6(-4.3,-1.2) 7(-4.3,-2) 8(-4.3,-2.8) 17(4.3,-2.8) 18(4.3,-2) 19(4.3,-1.2) 20(4.3,-0.4) 21(4.3,0.4) 22(4.3,1.2) 23(4.3,2) 24(4.3,2.8)
  rect 0.55x1.5 smd: 9(-2.8,-4.3) 10(-2,-4.3) 11(-1.2,-4.3) 12(-0.4,-4.3) 13(0.4,-4.3) 14(1.2,-4.3) 15(2,-4.3) 16(2.8,-4.3) 25(2.8,4.3) 26(2,4.3) 27(1.2,4.3) 28(0.4,4.3) 29(-0.4,4.3) 30(-1.2,4.3) 31(-2,4.3) 32(-2.8,4.3)
  silkscreen extent -3.4,-3.4 3.4,3.4
ResQuad-320X150 [mm] "Concave terminal quad pack resistor."
  rect 0.6x0.6 smd: 1(-1.2,-0.65) 2(-0.4,-0.65) 3(0.4,-0.65) 4(1.2,-0.65) 5(1.2,0.65) 6(0.4,0.65) 7(-0.4,0.65) 8(-1.2,0.65)
  silkscreen extent -1.73,-0.62 1.75,0.65
SOIC127P500X600-8N [mm]
  rect 0.6x2.2 smd: 1(-1.905,-2.6) 2(-0.635,-2.6) 3(0.635,-2.6) 4(1.905,-2.6) 5(1.905,2.6) 6(0.635,2.6) 7(-0.635,2.6) 8(-1.905,2.6)
  silkscreen extent -2.4,-1.9 2.4,1.9, body extent -2.46,-2.67 2.44,2.69, height 2.03
SOP10-50P300X300-10N [mm]
  rect 1.45x0.3 smd: 1(0,0) 2(0,-0.5) 3(0,-1) 4(0,-1.5) 5(0,-2) 6(4.4,-2) 7(4.4,-1.5) 8(4.4,-1) 9(4.4,-0.5) 10(4.4,0)
  silkscreen extent -0.15,-2.25 3.38,0.81
SOP65P640X120-14N [mil]
  rect 58x14 smd: 1(-115,77) 2(-115,51) 3(-115,26) 4(-115,0) 5(-115,-26) 6(-115,-51) 7(-115,-77) 8(115,-77) 9(115,-51) 10(115,-26) 11(115,0) 12(115,26) 13(115,51) 14(115,77)
  silkscreen extent -89,-100 89,100
SOP65P640X120-25N [mm]
  rect 1.57x0.41 smd: 1(-2.87,3.575) 2(-2.87,2.925) 3(-2.87,2.275) 4(-2.87,1.625) 5(-2.87,0.975) 6(-2.87,0.325) 7(-2.87,-0.325) 8(-2.87,-0.975) 9(-2.87,-1.625) 10(-2.87,-2.275) 11(-2.87,-2.925) 12(-2.87,-3.575) 13(2.87,-3.575) 14(2.87,-2.925) 15(2.87,-2.275) 16(2.87,-1.625) 17(2.87,-0.975) 18(2.87,-0.325) 19(2.87,0.325) 20(2.87,0.975) 21(2.87,1.625) 22(2.87,2.275) 23(2.87,2.925) 24(2.87,3.575)
  rect 2.025x2.68 smd: 25(0,0)
  silkscreen extent -3.13,-3.9 2.2,4.36
SOP65P650X440-20N [mm]
  rect 1.55x0.25 smd: 1(0,0) 2(0,-0.65) 3(0,-1.3) 4(0,-1.95) 5(0,-2.6) 6(0,-3.25) 7(0,-3.9) 8(0,-4.55) 9(0,-5.2) 10(0,-5.85) 11(5.6,-5.85) 12(5.6,-5.2) 13(5.6,-4.55) 14(5.6,-3.9) 15(5.6,-3.25) 16(5.6,-2.6) 17(5.6,-1.95) 18(5.6,-1.3) 19(5.6,-0.65) 20(5.6,0)
  silkscreen extent -0.13,-6.18 4.32,0.76
SOP65P780X200-28N [mil]
  rect 65x17 smd: 1(-143,166) 2(-143,141) 3(-143,115) 4(-143,90) 5(-143,64) 6(-143,38) 7(-143,13) 8(-143,-13) 9(-143,-38) 10(-143,-64) 11(-143,-90) 12(-143,-115) 13(-143,-141) 14(-143,-166) 15(143,-166) 16(143,-141) 17(143,-115) 18(143,-90) 19(143,-64) 20(143,-38) 21(143,-13) 22(143,13) 23(143,38) 24(143,64) 25(143,90) 26(143,115) 27(143,141) 28(143,166)
  silkscreen extent -110,-207 110,207
SOP-65P200X125-5N [mm]
  rect 1x0.47 smd: 1(0,0) 2(0,-0.65) 3(0,-1.3) 4(1.8,-1.3) 5(1.8,0)
  silkscreen extent -0.42,-1.85 1.8,0.57
SOT23-6_N [mm] "SOT23, 6-Leads, Body 2.9x1.6mm, Pitch 0.95mm, Lead Span 2.7mm, IPC Medium Density"
  rect 1.1x0.65 smd: 1(-1.2,0.95) 2(-1.2,0) 3(-1.2,-0.95) 4(1.2,-0.95) 5(1.2,0) 6(1.2,0.95)
  silkscreen extent -1.32,-1.55 0.25,1.95, body extent -0.9,-1.55 0.9,1.55, height 1.45
SOT-23-5_95P290X160-5N [mm]
  rect 1.1x0.6 smd: 1(0,0) 2(0,-0.95) 3(0,-1.9) 4(2.8,-1.9) 5(2.8,0)
  silkscreen extent -0.99,-2.16 1.96,0.25

## Part data
C1 C2 C37 C38 C39: library part "Cap Semi", "Capacitor (Semiconductor SIM Model)", LatestRevisionDate=29-May-2009, LatestRevisionNote="IPC-7351 Footprint Added.", PackageDescription="Chip Capacitor", PackageReference=C1206, Published=8-Jun-2000, Publisher="Altium Limited", Supplier=Digi-Key
C4 C5 C6 C10 C12 C13 C14 C19 C20 C21 C23 C28 C29 C30 C35 C62: library part "Cap Semi", "Capacitor (Semiconductor SIM Model)", Supplier Part Number=587-3807-1-ND, LatestRevisionDate=29-May-2009, LatestRevisionNote="IPC-7351 Footprint Added.", PackageDescription="Chip Capacitor", PackageReference=C1206, Published=8-Jun-2000, Publisher="Altium Limited", Supplier=Digi-Key
C7 C8 C44 C45: library part "Cap Semi", "Capacitor (Semiconductor SIM Model)", Supplier Part Number=490-16416-1-ND, LatestRevisionDate=29-May-2009, LatestRevisionNote="IPC-7351 Footprint Added.", PackageDescription="Chip Capacitor", PackageReference=C1206, Published=8-Jun-2000, Publisher="Altium Limited", Supplier=Digi-Key
C9 C16_MC1 C16_MC2 C22 C24 C26 C34: library part "Cap Semi", "Capacitor (Semiconductor SIM Model)", Supplier Part Number=587-3258-1-ND, LatestRevisionDate=29-May-2009, LatestRevisionNote="IPC-7351 Footprint Added.", PackageDescription="Chip Capacitor", PackageReference=C1206, Published=8-Jun-2000, Publisher="Altium Limited", Supplier=Digi-Key
C11: library part "Cap Semi", "Capacitor (Semiconductor SIM Model)", Supplier Part Number=587-5087-1-ND, LatestRevisionDate=29-May-2009, LatestRevisionNote="IPC-7351 Footprint Added.", PackageDescription="Chip Capacitor", PackageReference=C1206, Published=8-Jun-2000, Publisher="Altium Limited", Supplier=Digi-Key
C15 C64: library part "Cap Semi", "Capacitor (Semiconductor SIM Model)", Supplier Part Number=1276-1972-1-ND, LatestRevisionDate=29-May-2009, LatestRevisionNote="IPC-7351 Footprint Added.", PackageDescription="Chip Capacitor", PackageReference=C1206, Published=8-Jun-2000, Publisher="Altium Limited", Supplier=Digi-Key
C17_MC1 C17_MC2: library part "Cap Semi", "Capacitor (Semiconductor SIM Model)", Supplier Part Number=587-2708-1-ND, LatestRevisionDate=29-May-2009, LatestRevisionNote="IPC-7351 Footprint Added.", PackageDescription="Chip Capacitor", PackageReference=C1206, Published=8-Jun-2000, Publisher="Altium Limited", Supplier=Digi-Key
C18_MC1 C18_MC2: library part "Cap Semi", "Capacitor (Semiconductor SIM Model)", Supplier Part Number=1276-1085-1-ND, LatestRevisionDate=29-May-2009, LatestRevisionNote="IPC-7351 Footprint Added.", PackageDescription="Chip Capacitor", PackageReference=C1206, Published=8-Jun-2000, Publisher="Altium Limited", Supplier=Digi-Key
C25 C31 C33 C36: library part "Cap Semi", "Capacitor (Semiconductor SIM Model)", Supplier Part Number=490-1550-1-ND, LatestRevisionDate=29-May-2009, LatestRevisionNote="IPC-7351 Footprint Added.", PackageDescription="Chip Capacitor", PackageReference=C1206, Published=8-Jun-2000, Publisher="Altium Limited", Supplier=Digi-Key
C27: library part "Cap Semi", "Capacitor (Semiconductor SIM Model)", Supplier Part Number=1276-1112-1-ND, LatestRevisionDate=29-May-2009, LatestRevisionNote="IPC-7351 Footprint Added.", PackageDescription="Chip Capacitor", PackageReference=C1206, Published=8-Jun-2000, Publisher="Altium Limited", Supplier=Digi-Key
C32: library part Cap, "Capacitor", Supplier Part Number=587-3258-1-ND, LatestRevisionDate=17-Jul-2002, LatestRevisionNote="Re-released for DXP Platform.", PackageDescription="Radial Cap, Thru-Hole; 2 Leads; 0.3 in Pin Spacing", Published=8-Jun-2000, Publisher="Altium Limited", Supplier=Digi-Key
C42 C43: "Capacitor (Semiconductor SIM Model)", LatestRevisionDate=29-May-2009, LatestRevisionNote="IPC-7351 Footprint Added.", PackageDescription="Chip Capacitor", PackageReference=C1206, Published=8-Jun-2000, Publisher="Altium Limited"
C63: library part "Cap Semi", "Capacitor (Semiconductor SIM Model)", Supplier Part Number=1276-1632-1-ND, LatestRevisionDate=29-May-2009, LatestRevisionNote="IPC-7351 Footprint Added.", PackageDescription="Chip Capacitor", PackageReference=C1206, Published=8-Jun-2000, Publisher="Altium Limited", Supplier=Digi-Key
D1 D2 D3 D4 D5 D6 D7 D8 D9 D10 D11 D12 D15 D16 D17 D18_MC1 D18_MC2: "Typical RED, GREEN, YELLOW, AMBER GaAs LED", LatestRevisionDate=17-Jul-2002, LatestRevisionNote="Re-released for DXP Platform.", PackageDescription="SM LED; 2 Flat Leads", PackageReference=3.2X1.6X1.1, PackageVersion=Feb-2002, Published=8-Jun-2000, Publisher="Altium Limited"
  D1 D2 D3 D4 D5 D6 D7 D8 D9 D10 D11 D12: Supplier=Digi-Key
P1: library part "Header 3X2", "Header, 3-Pin, Dual row", LatestRevisionDate=17-Jul-2002, LatestRevisionNote="Re-released for DXP Platform.", Publisher="Altium Limited", Supplier=Digi-Key
P2: library part "Header 10", "Header, 10-Pin", Supplier Part Number=H10329CT-ND, LatestRevisionDate=17-Jul-2002, LatestRevisionNote="Re-released for DXP Platform.", Publisher="Altium Limited", Supplier=Digi-Key
P3 P4 P16 P18: library part "Header 10", "Header, 10-Pin", LatestRevisionDate=17-Jul-2002, LatestRevisionNote="Re-released for DXP Platform.", Publisher="Altium Limited", Supplier=Digi-Key
P5 P6 P7 P8 P11 P12 P13 P14 P15: library part "Header 2", "Header, 2-Pin", LatestRevisionDate=17-Jul-2002, LatestRevisionNote="Re-released for DXP Platform.", Publisher="Altium Limited", Supplier=Digi-Key
P10: library part "Header 2X2", "Header, 2-Pin, Dual row", LatestRevisionDate=17-Jul-2002, LatestRevisionNote="Re-released for DXP Platform.", Publisher="Altium Limited", Supplier=Digi-Key
P16_MC1 P16_MC2: library part "Header 4", "Header, 4-Pin", LatestRevisionDate=17-Jul-2002, LatestRevisionNote="Re-released for DXP Platform.", Publisher="Altium Limited", Supplier=Digi-Key
P17: "Header, 10-Pin, Dual row", LatestRevisionDate=17-Jul-2002, LatestRevisionNote="Re-released for DXP Platform.", Publisher="Altium Limited"
P19: "Header, 3-Pin, Dual row", LatestRevisionDate=17-Jul-2002, LatestRevisionNote="Re-released for DXP Platform.", Publisher="Altium Limited", Supplier=Digi-Key
P21: "Header, 10-Pin, Dual row, Right Angle", LatestRevisionDate=17-Jul-2002, LatestRevisionNote="Re-released for DXP Platform.", Publisher="Altium Limited"
P22: "Header, 10-Pin", LatestRevisionDate=17-Jul-2002, LatestRevisionNote="Re-released for DXP Platform.", Publisher="Altium Limited"
Q1 Q2 Q3: library part FDC637BNZCT-ND, "N-MOS, low gate ON voltage", Supplier=Digi-Key, Supplier Part Number=FDC637BNZCT-ND
R1 R2 R3 R5 R6 R7 R8 R9 R10 R11 R12 R13 R14 R15 R16 R17 R18 R19 R20 R20_MC1 R20_MC2 R21_MC1 R21_MC2 R22 R22_MC1 R22_MC2 R23_MC1 R23_MC2 R24 R24_MC1 R24_MC2 R25_MC1 R25_MC2 R26_MC1 R26_MC2 R27_MC1 R27_MC2 R28_MC1 R28_MC2 R29_MC1 R29_MC2 R30_MC1 R30_MC2 R31_MC1 R31_MC2 R32 R33 R34 R35 R36 R37 R38 R39 R40 R44 R45 R46 R47 R48 R49 R50 R51 R54 R55 R57 R59 R61 R62 R63 R64 R65: library part Res3, "Resistor", LatestRevisionDate=29-May-2009, LatestRevisionNote="IPC-7351 Footprint Added.", PackageDescription="Chip Resistor", PackageReference=J1-0603, Published=8-Jun-2000, Publisher="Altium Limited", Supplier=Digi-Key
R4 R52 R53: library part "Res Quad Pack", "Quad pack resistor", Supplier Part Number=Y4101CT-ND, Supplier=Digi-Key
R41 R42 R43: library part "Res Quad Pack", "Quad pack resistor", Supplier=Digi-Key
R68 R69 R70 R71_MC1 R71_MC2: "Resistor", LatestRevisionDate=29-May-2009, LatestRevisionNote="IPC-7351 Footprint Added.", PackageDescription="Chip Resistor", PackageReference=J1-0603, Published=8-Jun-2000, Publisher="Altium Limited"
S1: library part SW-DPDT, "Double-Pole, Double-Throw Switch", Supplier Part Number=401-2000-ND, LatestRevisionDate=17-Jul-2002, LatestRevisionNote="Re-released for DXP Platform.", PackageDescription="Switch; 6 Leads", PackageReference=DPDT-6, Published=24-Mar-1999, Publisher="Altium Limited", Supplier=Digi-Key
S2: library part SW-PB, "Switch", Supplier Part Number=CKN10587CT-ND, LatestRevisionDate=17-Jul-2002, LatestRevisionNote="Re-released for DXP Platform.", PackageDescription="Switch; 2 Leads", PackageReference=SPST-2, Published=24-Mar-1999, Publisher="Altium Limited", Supplier=Digi-Key
S3: "Switch", LatestRevisionDate=17-Jul-2002, LatestRevisionNote="Re-released for DXP Platform.", PackageDescription="Switch; 2 Leads", PackageReference=SPST-2, Published=24-Mar-1999, Publisher="Altium Limited"
U1: "Octal buffer or driver with 3-state outputs.", Supplier Part Number 1=296-1230-1-ND, Supplier=Digi-Key, Supplier 1=Digi-Key
U2 U20: "Atmel 8-bit AVR microcontroller.", Supplier Part Number 1=ATMEGA32M1-AURCT-ND, Supplier=Digi-Key, Supplier 1=Digi-Key
U3 U21: "Six element 1-bit non-inverting open-drain buffer.", Supplier Part Number=296-27916-1-ND, Supplier=Digi-Key
U4: "3.3V CAN Transceiver with Standby Mode, Loop-back 8-SOIC -40 to 125", Package="SOIC-8 Texas Instruments", Supplier Part Number 1=296-14639-5-ND, Availability=Good, MF="Texas Instruments", MP=SN65HVD233D, Price="2.39 USD", SnapEDA_Link=https://www.snapeda.com/parts/SN65HVD233D/Texas%20Instruments/view-part/?ref=snap, Supplier=Digi-Key, Supplier 1=Digi-Key
U5 U6 U7: "Open-drain output sub-microamp comparator.", Supplier Part Number 1=MCP6546T-E/OTCT-ND, Supplier 1=Digi-Key
U8_MC1 U8_MC2: "Dual-bridge stepper or dc motor driver. 1.5A per coil with 2.5-10.8 V load supply.", Supplier Part Number 1=296-41246-1-ND, Supplier=Digi-Key, Supplier 1=Digi-Key
U9: "16 bit I/O expander with SPI interface.", Supplier Part Number 1=MCP23S17-E/SS-ND, Supplier=Digi-Key, Supplier 1=Digi-Key
U10 U11 U12 U18: "Low power, low noise rail-to-rail op-amp.", Supplier=Digi-Key
U13: "Voltage Reference", Supplier Part Number 1=296-22203-5-ND, Supplier=Digi-Key, Supplier 1=Digi-Key
U14: "Digital humidity/temperature sensors. +/- 3% RH, 0-100%, SPI output. Model version with filter and condensation resistant.", Supplier Part Number 1=480-5705-1-ND, Supplier=Digi-Key, Supplier 1=Digi-Key
U15: "13 bit plus sign digital temperature sensor. Nominal +/- 1 C accuracy from 0-70 C.", Supplier Part Number 1=LM95071CIMF/NOPBCT-ND, Supplier=Digi-Key, Supplier 1=Digi-Key
U16: "Digital 24-bit pressure sensor with SPI output. Operating range from 0-5bar, includes onboard temperature sensor and hermetic seal.", Supplier Part Number 1=223-1625-5-ND, Supplier=Digi-Key, Supplier 1=Digi-Key
U17: "ADC"
U19: "12-bit, low-power, voltage-output DAC with internal reference.", Supplier Part Number 1=296-29022-1-ND, Supplier=Digi-Key, Supplier 1=Digi-Key
Y1 Y2: library part "8MHz Abracom 4-Pin Crystal", "8MHz Abracom 4-pin crystal.", Supplier Part Number 1=535-13456-1-ND, Supplier 1=Digi-Key

## Via types
v1: diameter 0.559, hole 0.254, Top Layer to Bottom Layer, 376 vias
v2: diameter 1.5, hole 1.1, Top Layer to Bottom Layer, 32 vias
v3: diameter 6, hole 3.6, Top Layer to Bottom Layer, 8 vias

## Nets (pads, with @x,y where several pads share a name; then routed paths per layer and width w, separated by ;. In a path a pad name is that pad's centre, name@x,y a point inside that pad or via, vN(x,y) a via of type N, cw(c..) or ccw(c..) an arc to the next point about the centre after c; other vN are vias at no path point)
2V5: P3.1 P3.3 P3.5 P3.7 P3.9 P4.1 P4.3 P4.5 P4.7 P4.9 U12.1 U12.4 | length 203.8
  Top Layer w0.5: P3.1@7,21.375 5.4,21.375 4.7,22.075 4.7,24.3 ; P3.3@7,23.875 5.125,23.875 4.7,24.3 ; P3.5@7,26.375 5.425,26.375 4.7,27.1 ; P3.7@7,28.875 5.225,28.875 4.7,29.4 ; P3.9@7,31.375 5.7,31.375 4.7,32.375 ; v1(58.1,42.6) 11.732,42.6 8.73,39.598 7.298,39.598 4.7,37 4.7,32.375 ; v1(76.3,42.5) 76.396,42.404 121.971,42.404 123.3,41.075 123.3,30.2 ; P4.9@121,22.625 122.125,22.625 123.3,23.8 123.3,30.2 ; P4.3@121,30.125 123.225,30.125 123.3,30.2 ; P4.1@121,32.625 121.075,32.7 123,32.7 ; P4.5@121.543,27.625 120.279,27.625 119.5,26.846 119.5,25.64 120.015,25.125 123,25.125 ; 4.7,24.3 4.7,27.1 ; 4.7,27.1 4.7,29.4 ; 4.7,29.4 4.7,32.375
  Bottom Layer w0.254: U12.4@77.7,28.463 78.454,29.217 78.454,29.587 78.623,29.756
  Bottom Layer w0.5: v1(58.1,42.6) 58.4,42.6 62.4,46.6 65.6,46.6 68.8,43.4 75.4,43.4 v1(76.3,42.5) 73.8,40 73.8,33.6 76.733,30.667 77.572,30.667 77.705,30.8 78.2,30.8 78.623,30.377 78.623,29.756 U12.1@79.5,29.756 ; U12.4@77.7,28.456 U12.4@77.7,28.463
"2V5 OUT": C26.2 C32.2 U12.3 U13.6 U17.31 | length 26.6
  Top Layer w0.254: U17.31@65.684,36.676 65.684,36.266 v1(66.85,35.1) C32.2@67.9,35.1 ; C26.2@78.1,24.721 78.1,26.15 79.122,27.172 U13.6@80.441,27.172 80.441,27.466 v1(80.2,27.707)
  Top Layer w0.5: v1(70.433,30.8) 70.566,30.667 77.052,30.667 77.9,29.819 77.9,28.656 78.849,27.707 v1(80.2,27.707)
  Bottom Layer w0.254: U12.3@79.5,28.456 80.2,27.756 v1(80.2,27.707)
  Bottom Layer w0.5: v1(66.85,35.1) 66.85,34.25 70.3,30.8 v1(70.433,30.8)
3V3: C1.2 C2.2 C4.2 C5.2 C9.2 C10.2 C13.1 C14.1 C15.1 C19.2 C20.2 C21.2 C22.2 C23.2 C24.2 C27.2 C29.2 C30.2 C31.2 C33.2 C34.2 C35.2 C37.2 C38.2 C42.2 C43.2 C62.2 C63.2 P1.2 P2.9 P5.1 P7.1 P16.1 P16.10 P17.2 P17.19 P18.1 P18.10 P19.2 P21.17 P21.19 R5.2 R6.1 R7.1 R8.1 R9.1 R10.1 R20.2 R20_MC1.2 R20_MC2.2 R22.2 R23_MC1.2 R23_MC2.2 R24.2 R32.2 R33.2 R34.1 R36.1 R38.1 R45.2 R46.2 R47.2 R48.1 R49.2 R54.2 R57.1 R59.1 R61.1 R62.1 R63.1 R64.1 R65.1 U1.20 U2.4 U2.19 U3.14 U4.3 U5.5 U6.5 U7.5 U9.9 U10.5 U11.5 U12.5 U13.2 U14.8 U15.5 U16.5 U17.21 U17.28 U17.32 U18.5 U19.9 U20.4 U20.19 U21.14 | length 136.9
  Top Layer w0.254: P16.1@19.375,47 v1(19.375,47.675) ; R65.1@23.05,22.125 R63.1@23.05,23.8 R62.1@23.05,25.575 v1(23.05,26.45) R57.1@23.05,30.875 ; R22.2@29.796,27.465 29.796,25.715 v1(30.546,24.965) C37.2@31.6,24.965 33.444,24.965 U20.4@33.479,25 ; P16.10@30.625,47 v1(30.625,47.524) ; v1(32.8,30.5) R24.2@34.22,30.5 ; v1(36.3,4.3) 36.306,4.306 R23_MC2.2@37.25,4.306 ; U20.19@42.079,23.4 43.3,23.4 v1(43.8,22.9) 43.9,22.8 C38.2@45.1,22.8 ; v1(47.1,47) P5.1@48.2,47 ; v1(50.45,3.95) R20_MC2.2@50.45,4.725 ; U11.5@53.8,44.9 53.8,46.95 v1(54.1,47.25) ; P17.2@58.285,21.968 v1(58.3,21.953) ; R49.2@59.45,36.019 58.3,37.169 58.3,38.4 58.8,38.9 v1(58.8,39) C33.2@59.925,39 61,39 61.862,39 U17.21@61.95,38.911 ; v1(64.1,34.514) 64.1,35.3 64.185,35.385 U17.28@64.185,36.676 ; v1(65.158,12.5) U9.9@65.158,11.154 65.2,11.112 65.2,9.7 C19.2@65.5,9.4 ; U17.32@66.192,36.676 v1(66.85,36.019) ; U18.5@69.3,37.85 v1(69.3,37.2) C35.2@69.3,36.5 70.505,36.5 C34.2@70.605,36.4 ; P17.19@69.715,26.032 v1(69.716,26.031) ; C24.2@73.1,28.3 73.242,28.442 U13.2@75.241,28.442 76.132,28.442 v1(76.769,29.079) ; v1(73.9,4.2) R23_MC1.2@75.35,4.2 ; R47.2@77.662,17.6 R46.2@78.75,17.6 78.75,19.607 79.275,20.132 U19.9@80.15,20.132 82.3,20.132 C62.2@82.55,20.382 83.038,20.382 ; P7.1@78.5,47 v1(78.5,48.5) ; C20.2@82.3,45.6 82.8,45.1 U10.5@82.8,44.528 v1(82.8,43.9) ; v1(83,20) 83.038,20.038 83.038,20.382 ; C63.2@83.525,20.382 83.038,20.382 ; C4.2@87.4,25.3 87.635,25.065 U2.4@89.293,25.065 v1(90.613,25.065) ; R54.2@93.406,48.349 93.406,47.475 v1(93.681,47.2) 93.775,47.106 U15.5@94.848,47.106 95.813,47.106 C29.2@96.256,47.549 ; U2.19@97.893,23.465 98.735,23.465 C5.2@100.1,22.1 ; C5.2@100,22.3 v1(100.846,22.3) ; C27.2@102.1,27.365 102.135,27.4 v1(103.4,27.4) 103.489,27.489 U14.8@103.489,29.1 ; v1(104.625,6.631) v1(104.625,7.378) ; C9.2@105.027,13.031 C10.2@106.277,13.031 106.657,13.031 106.777,13.151 v1(107.7,13.151) U4.3@109.727,13.151 ; R45.2@106.029,20.45 v1(107.15,20.45) ; R64.1@106.3,43.529 106.351,43.58 R10.1@108.097,43.58 R9.1@109.847,43.58 v1(110.7,43.58) R8.1@111.597,43.58 R7.1@113.347,43.58 113.927,43 114.517,43 R6.1@115.097,43.58
  Bottom Layer w0.254: C13.1@18,19.6 18,18.848 17.776,18.624 17.786,18.614 v1(17.786,17.854) 17.786,17.398 17.776,17.388 U5.5@18.716,16.448 ; C14.1@18.2,14.3 17.8,13.9 v1(17.8,12.4) 17.8,11.7 18.45,11.05 U7.5@18.8,11.05 ; v1(18.3,20.8) C43.2@19.3,20.8 18.794,21.306 U21.14@18.794,23.604 ; v1(18.375,45.025) P18.10@18.375,45.5 ; v1(29.625,45.089) P18.1@29.625,45.5 ; v1(43.8,22.9) v1@43.9,22.8 ; v1(59.95,28.5) 60.839,28.5 C1.2@60.939,28.4 ; C2.2@60.939,29.5 C1.2@60.939,28.4 ; U1.20@61.2,27.05 60.939,27.311 60.939,28.2 C1.2@60.939,28.4 ; R34.1@65.2,17.025 65.925,16.3 69.025,16.3 ; R36.1@68.3,17.025 69.025,16.3 ; R32.2@74.8,18.55 R33.2@73.4,18.55 72.827,18.55 72.3,18.023 72.3,17.533 v1(72.4,17.433) 71.708,17.433 R38.1@71.3,17.025 70.575,16.3 69.025,16.3 ; C23.2@77.6,25.965 C22.2@77.6,27.274 77.026,27.274 76.769,27.531 v1(76.769,29.079) 77.445,29.756 U12.5@77.7,29.756 ; v1(92.6,30.2) 93.143,29.657 R5.2@93.143,28.9 ; v1(105,49) C42.2@105,47.95 105.32,47.63 U3.14@107.808,47.63 ; v1(108.3,25.6) U16.5@108.3,23.725 108.3,21.781 C30.2@108.381,21.7 ; R48.1@108.45,31.1 v1(109.4,31.1) ; U6.5@112.638,10.225 v1(113.41,10.997) 113.713,11.3 115.1,11.3 115.5,10.9 C15.1@115.848,10.9
  other v1: 88.55,4.619
+5: C16_MC1.2 C16_MC2.2 C17_MC1.2 C17_MC2.2 P2.4 P11.1 P12.1 P13.1 P14.1 P15.1 P21.15 R17.2 R18.2 R19.2 R68.2 R69.2 R70.2 U8_MC1.18 U8_MC1.19 U8_MC2.18 U8_MC2.19 | length 271.2
  Top Layer w0.254: R69.2@20.65,16.854 20.65,15.5 v1(20.75,15.4) ; P21.15@93,35.089 95.39,32.699 99.302,32.699 99.503,32.9 109.331,32.9 109.631,32.6 v1(112.5,32.6)
  Top Layer w0.75: 46.69,6.956 48.547,6.956 C17_MC2.2@48.997,7.406 50.28,7.406 C16_MC2.2@50.247,7.381 ; C16_MC2.2@50.8,7.2 51.4,6.6 v1(51.4,5.3) ; 84.79,6.85 86.647,6.85 C17_MC1.2@87.097,7.3 C16_MC1.2@88.38,7.3 ; C16_MC1.2@88.5,7.3 88.5,6.4 89.156,5.744 91.756,5.744 92.8,4.7 92.804,4.696 92.804,1.204 v1(92.8,1.2)
  Top Layer w1: v1(110.75,4.7) P2.4@110.75,7.262
  Bottom Layer w0.254: v1@112.35,32.7 115.64,32.7 116.9,33.96 116.9,37.205 118.595,38.9 121,38.9 121.4,38.5 121.4,36.875
  Bottom Layer w1: P11.1@8.5,38.125 7.025,38.125 6.6,37.7 6.6,36.472 7.199,35.873 7.749,35.873 9.306,34.316 9.306,17.931 P12.1@8.5,17.125 7.025,17.125 6.023,16.123 6.023,12.477 10.8,7.7 10.8,6.9 12.1,5.6 15.1,5.6 ; P15.1@15.05,8.5 15.1,8.45 15.1,5.6 ; R17.2@20.5,15.05 20.5,13.332 20.506,13.325 20.506,11.006 20.5,11 20.5,5.5 ; R18.2@114.188,8.7 117.9,8.7 117.95,8.65 ; P13.1@119.5,36.875 121.4,36.875 125.825,36.875 126.8,35.9 126.8,15.975 126.325,15.5 122.5,15.5 ; 119.721,15.5 122.5,15.5 ; 15.1,5.6 15.1,5.5 20.5,5.5 ; 20.5,5.5 40.5,5.5 41.806,4.194 45.294,4.194 46.1,5 51.1,5 v1(51.4,5.3) 51.5,5.2 52.9,5.2 56.9,1.2 v1(92.8,1.2) 107.25,1.2 v1(110.75,4.7) 114,4.7 117.95,8.65 ; 117.95,8.65 122.5,13.2 122.5,15.5
  other v1: 119.25,10.2 20.75,13.9
ADC_C\S\: R49.1 U2.27 U17.23 | length 43.4
  Top Layer w0.254: U17.23@61.95,37.921 61.375,37.921 61.077,37.623 61.077,33.992 61.085,34 63.86,34 63.879,33.981 89.231,33.981 v1(89.5,34.25) ; U2.27@94.793,28.965 94.793,27.632 v1(94.8,27.625)
  Bottom Layer w0.254: v1(89.5,34.25) 90.132,33.619 90.124,33.611 91.326,32.409 91.326,32.379 91.638,32.067 91.669,32.067 94.4,29.335 94.4,28.025 v1(94.8,27.625)
ADC_S\Y\N\C\: P17.15 U1.7 | length 6.3
  Top Layer w0.254: P17.15@67.175,26.032 67.175,24.225 67.746,23.654 v1(68.985,23.654)
  Bottom Layer w0.254: U1.7@66.8,23.15 67.65,23.15 68.15,23.65 68.146,23.654 v1(68.985,23.654)
CANH: P2.3 P21.2 R15.1 U4.7 | length 71.2
  Top Layer w0.254: P21.2@75.22,37.629 76.697,36.152 96.065,36.152 96.619,35.598 96.619,34.442 97.981,33.08 99.144,33.08 99.357,33.293 v1(109.693,33.293) ; P2.3@112.125,7 112.125,7.725 111.286,8.564 v1(111.286,13.386) 112.321,14.421 U4.7@114.927,14.421 117.155,14.421 R15.1@117.277,14.544
  Bottom Layer w0.254: v1(109.693,33.293) 111.216,31.769 111.216,30.079 111.202,30.065 111.202,23.381 111.216,23.367 111.216,17.755 110.819,17.358 110.819,14.442 111.286,13.976 v1(111.286,13.386)
CANL: P2.2 P21.4 R12.1 U4.6 | length 69.3
  Top Layer w0.254: P21.4@77.76,37.629 78.856,36.533 96.223,36.533 97,35.756 97,34.6 98.139,33.461 98.986,33.461 99.199,33.674 109.319,33.674 109.472,33.826 109.914,33.826 110.14,33.6 v1(110.5,33.6) ; v1(111.9,12.9) v1@111.9,12.8 ; P2.2@113.375,7 113.375,7.359 111.667,9.068 111.667,12.567 v1@111.9,12.8 ; R12.1@117.277,13.077 117.203,13.151 U4.6@114.927,13.151 112.251,13.151 v1@111.9,12.8
  Bottom Layer w0.254: v1(110.5,33.6) 110.554,33.546 110.554,33.246 111.597,32.203 111.597,29.921 111.583,29.907 111.583,23.539 111.597,23.525 111.597,17.597 111.2,17.2 111.2,14.6 111.9,13.9 v1(111.9,12.9)